# EAGLE board spec_layout_BRX_drawings (EAGLE 6.2)

Size 80 x 80 mm. Coordinates in mm from the lower left corner, seen from the top.
Outline: 0,0 80,0 80,80 0,80 0,0
Outline: 20,17.5 60,17.5 60,16 20,16 20,17.5
Outline: 17.5,20 17.5,60 16,60 16,20 17.5,20
Outline: 62.5,20 62.5,60 64,60 64,20 62.5,20
Outline: 20,62.5 60,62.5 60,64 20,64 20,62.5
Outline: circle at 40,40 radius 32.5
Copper layers (1*16): Top 0.035mm / dielectric 1.5mm / Bottom 0.035mm
Design rules: minimum track width 10mil, minimum drill 24mil, track to track 8mil, track to pad 8mil, pad to pad 8mil, via to via 8mil, smd to smd 8mil, copper to edge 40mil, drill to drill 8mil, minimum pad ring 10mil, minimum via ring 8mil, stop-mask expansion 4mil, vias tented up to drill 0mil, thermal gap 10mil
Holes 3 mm at 25,25 25,55 55,55 55,25

## Footprints (pad centres in the part's own frame; a part is rotated, then mirrored left to right if it is on the bottom)
CON3-2.54 = drill 1 pad 1.676 square: 1 -2.54,0 | drill 1 pad 1.676 octagon: 2 0,0; 3 2.54,0
CON4-2.54 = drill 1 square: 1 -3.81,0 | drill 1 octagon: 2 -1.27,0; 3 1.27,0; 4 3.81,0

## Placement (x,y rotation side)
E$1  [CON3-2.54]  55,61.5 0 top
E$2  [CON3-2.54]  61.5,25 270 top
E$3  [CON3-2.54]  25,18.5 180 top
E$4  [CON3-2.54]  18.5,55 90 top
E$5  [CON4-2.54]  27.5,61.5 0 top
E$6  [CON4-2.54]  61.5,52.5 270 top
E$7  [CON4-2.54]  52.5,18.5 180 top
E$8  [CON4-2.54]  18.5,27.5 90 top

## Library data of the parts
E$1-E$8 = lib_paul_v6

## Text on the board
Top: 1 | 1 | 1 | 1 | 1 | 1 | 1 | 1
Measures: All dimensions in mm